# Altium PCB USB2CANFD.PcbDoc
Units mm, origin at the board's own origin, x right, y up, seen from the top; angles counter-clockwise.
Board outline 44.11 x 53.99 mm, 4 copper layers (TOP, PWR, GND, BOTTOM), stack 0.881 mm thick; 65 components, 67 nets, 249 pads, 228 vias.
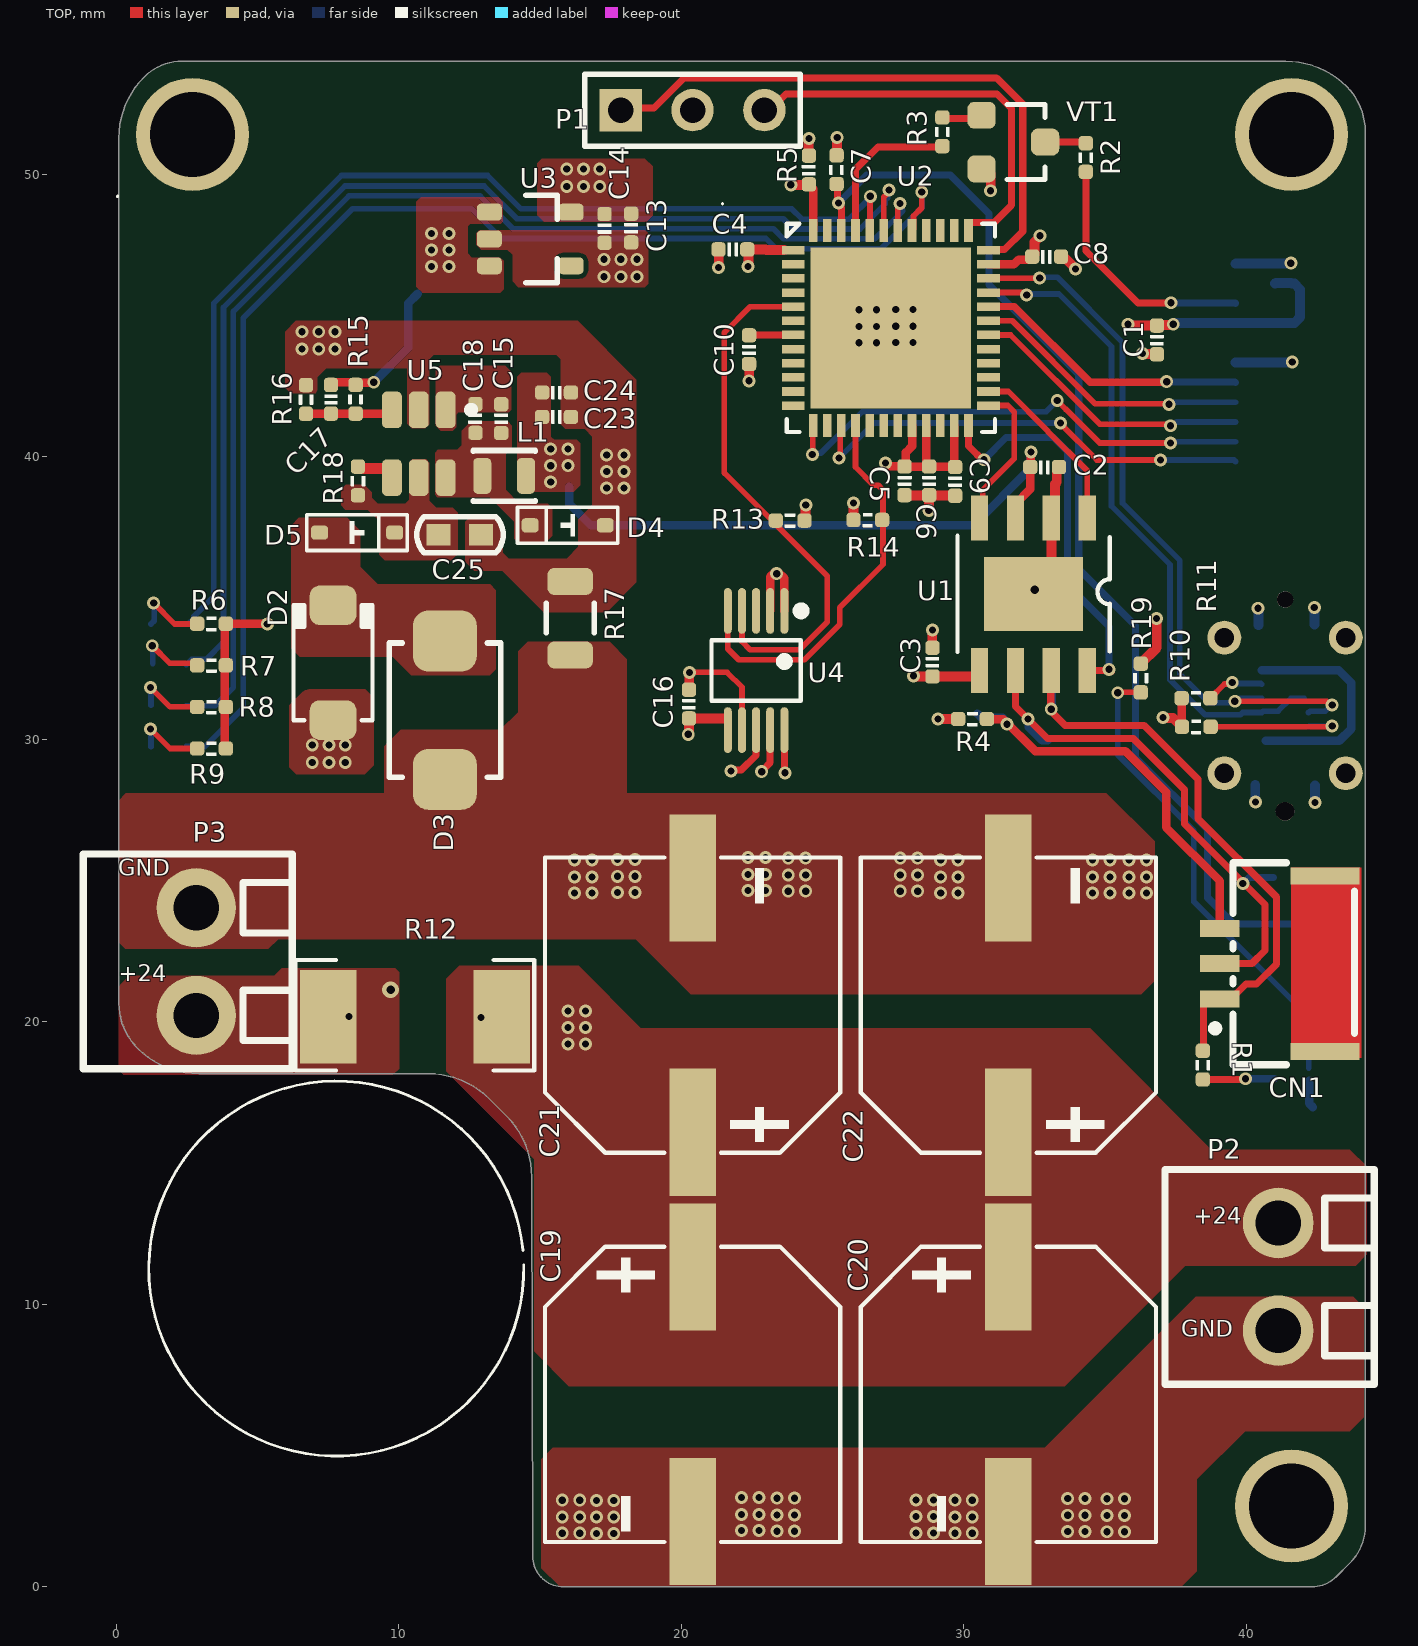
[diagram p0: TOP view]
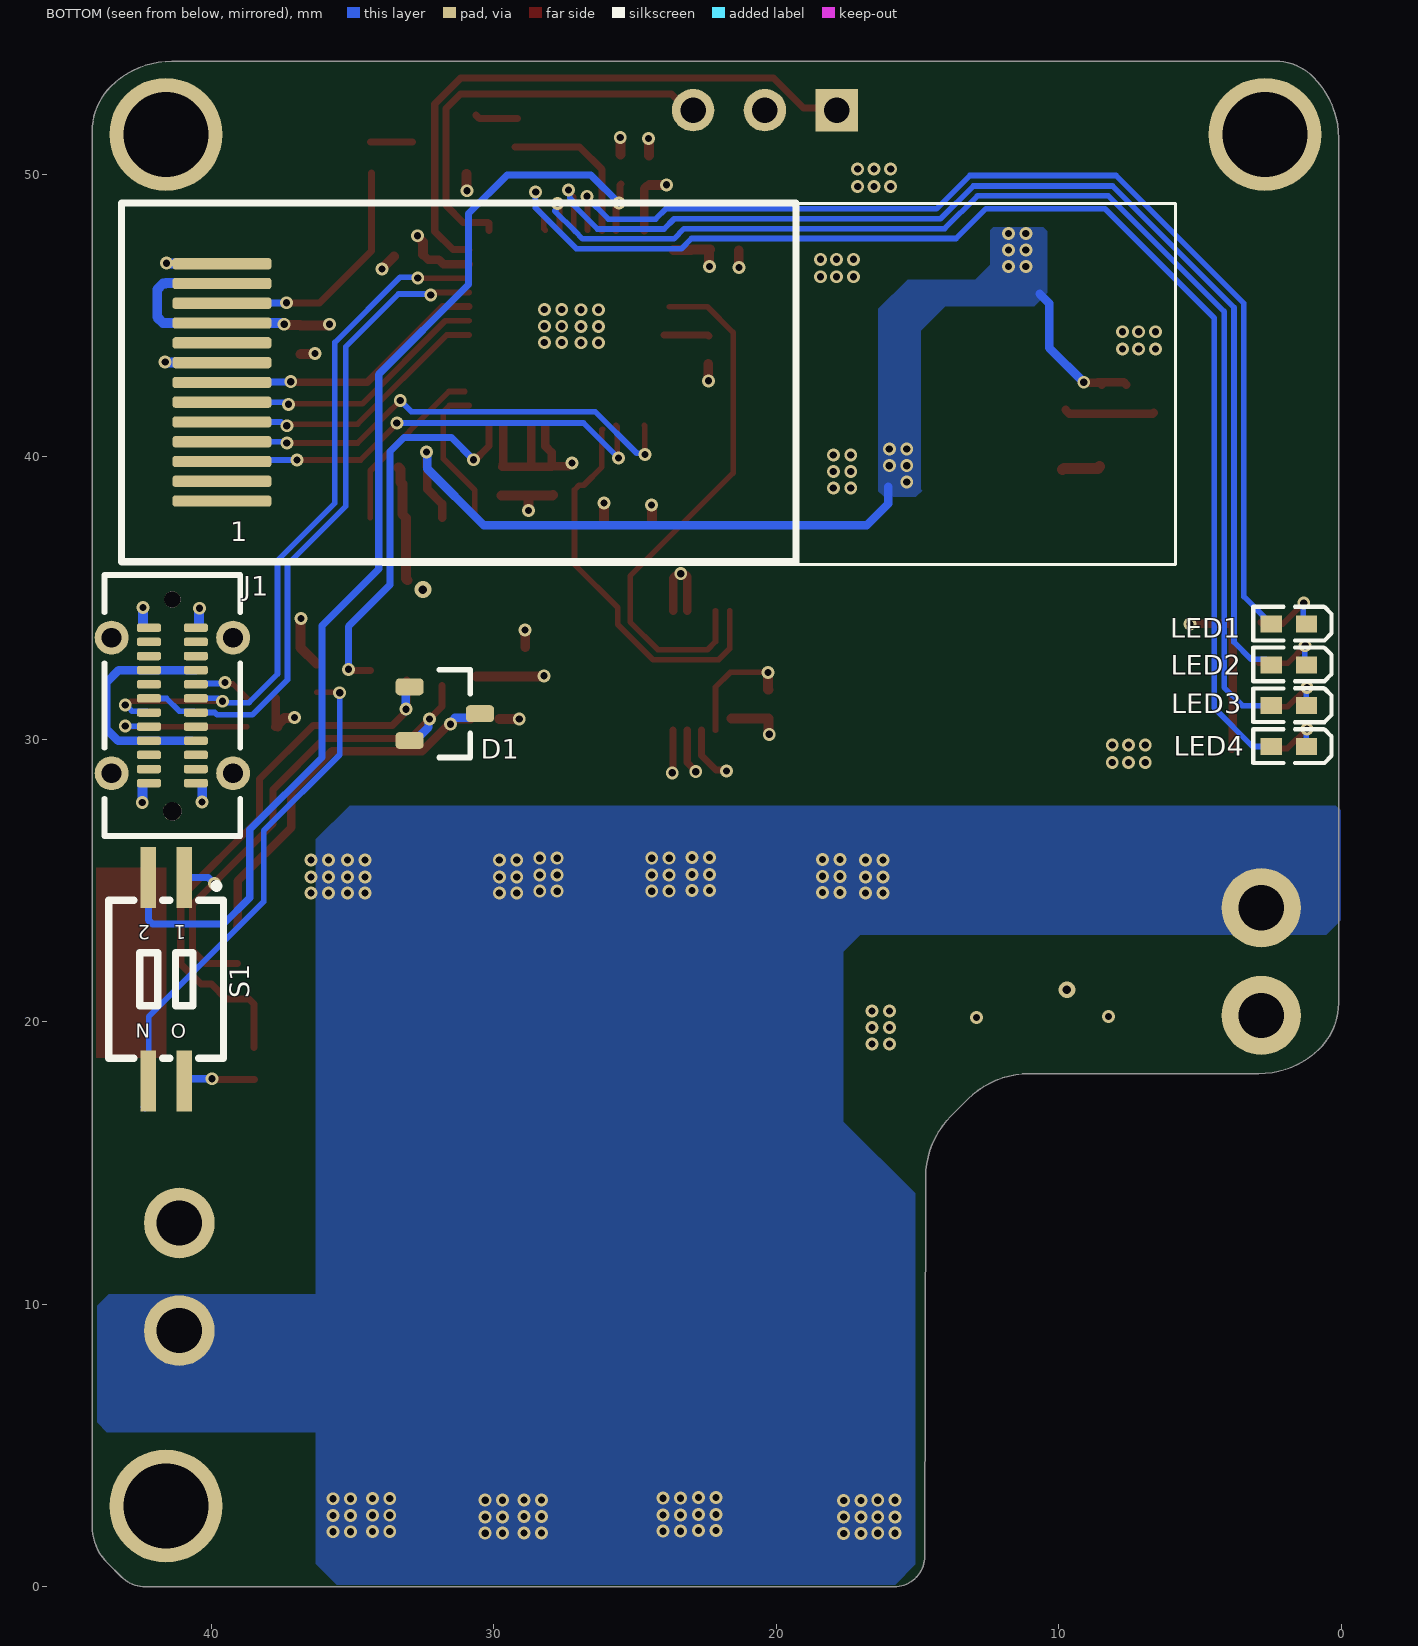
[diagram p1: BOTTOM view, seen from below]
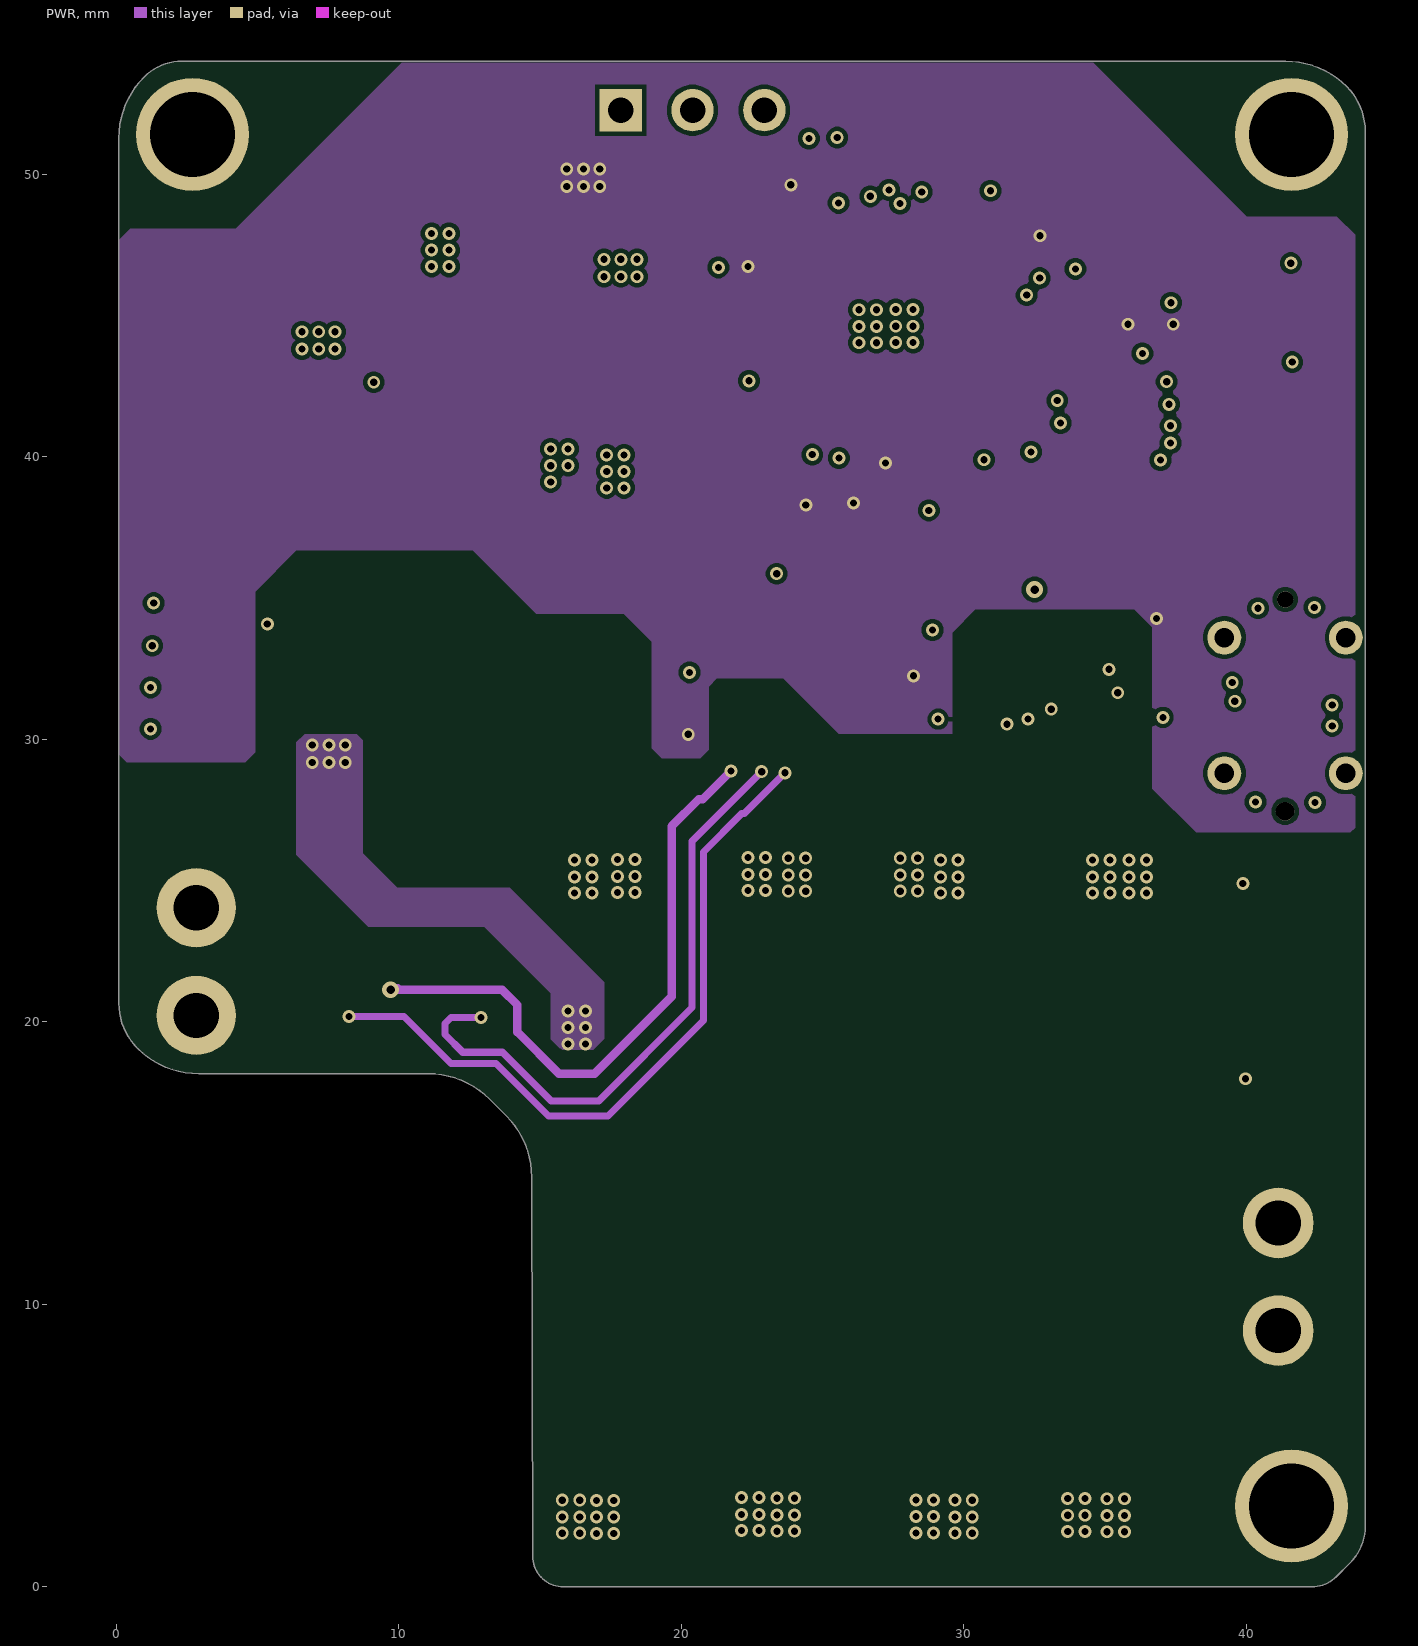
[diagram p2: PWR]
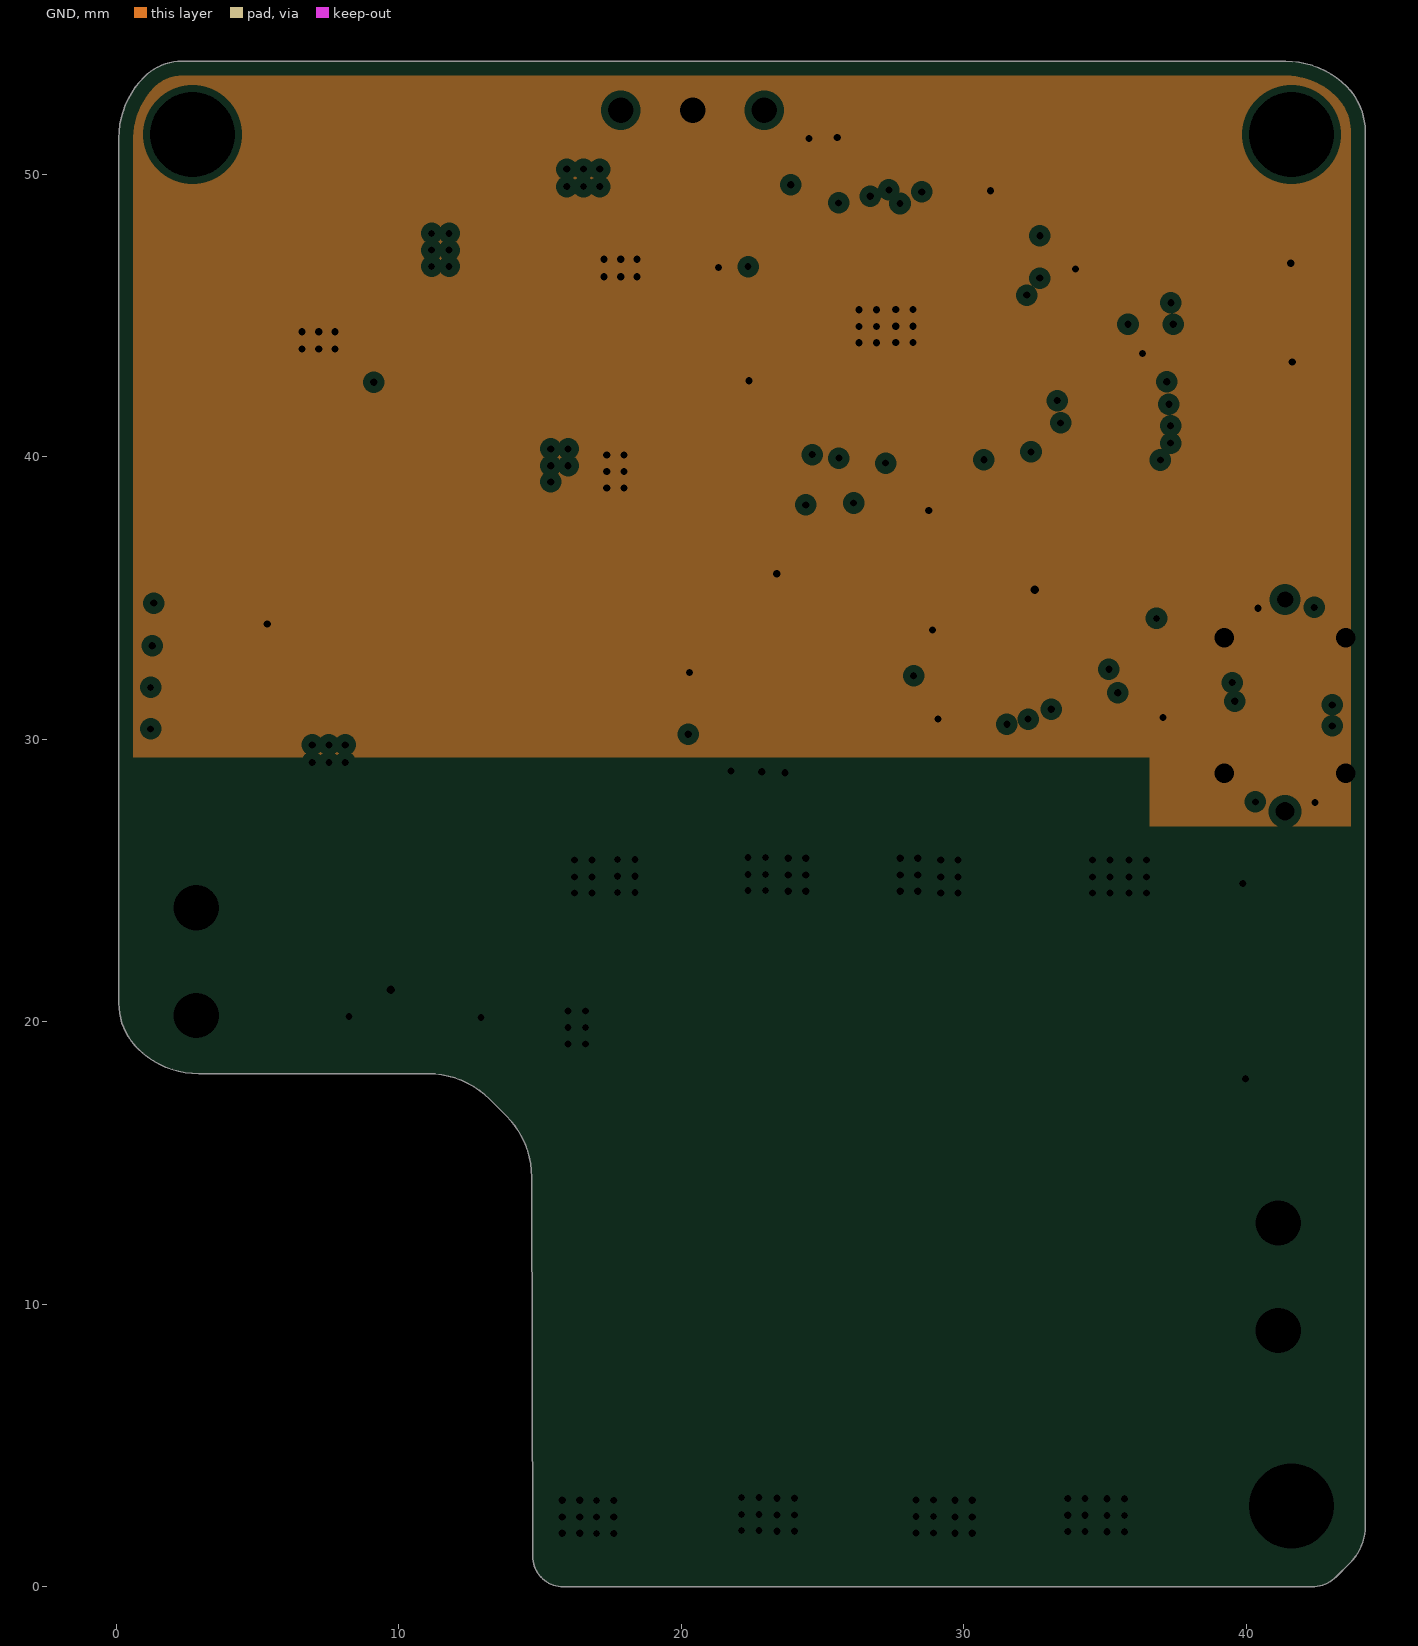
[diagram p3: GND, clearances drawn from the general rule]
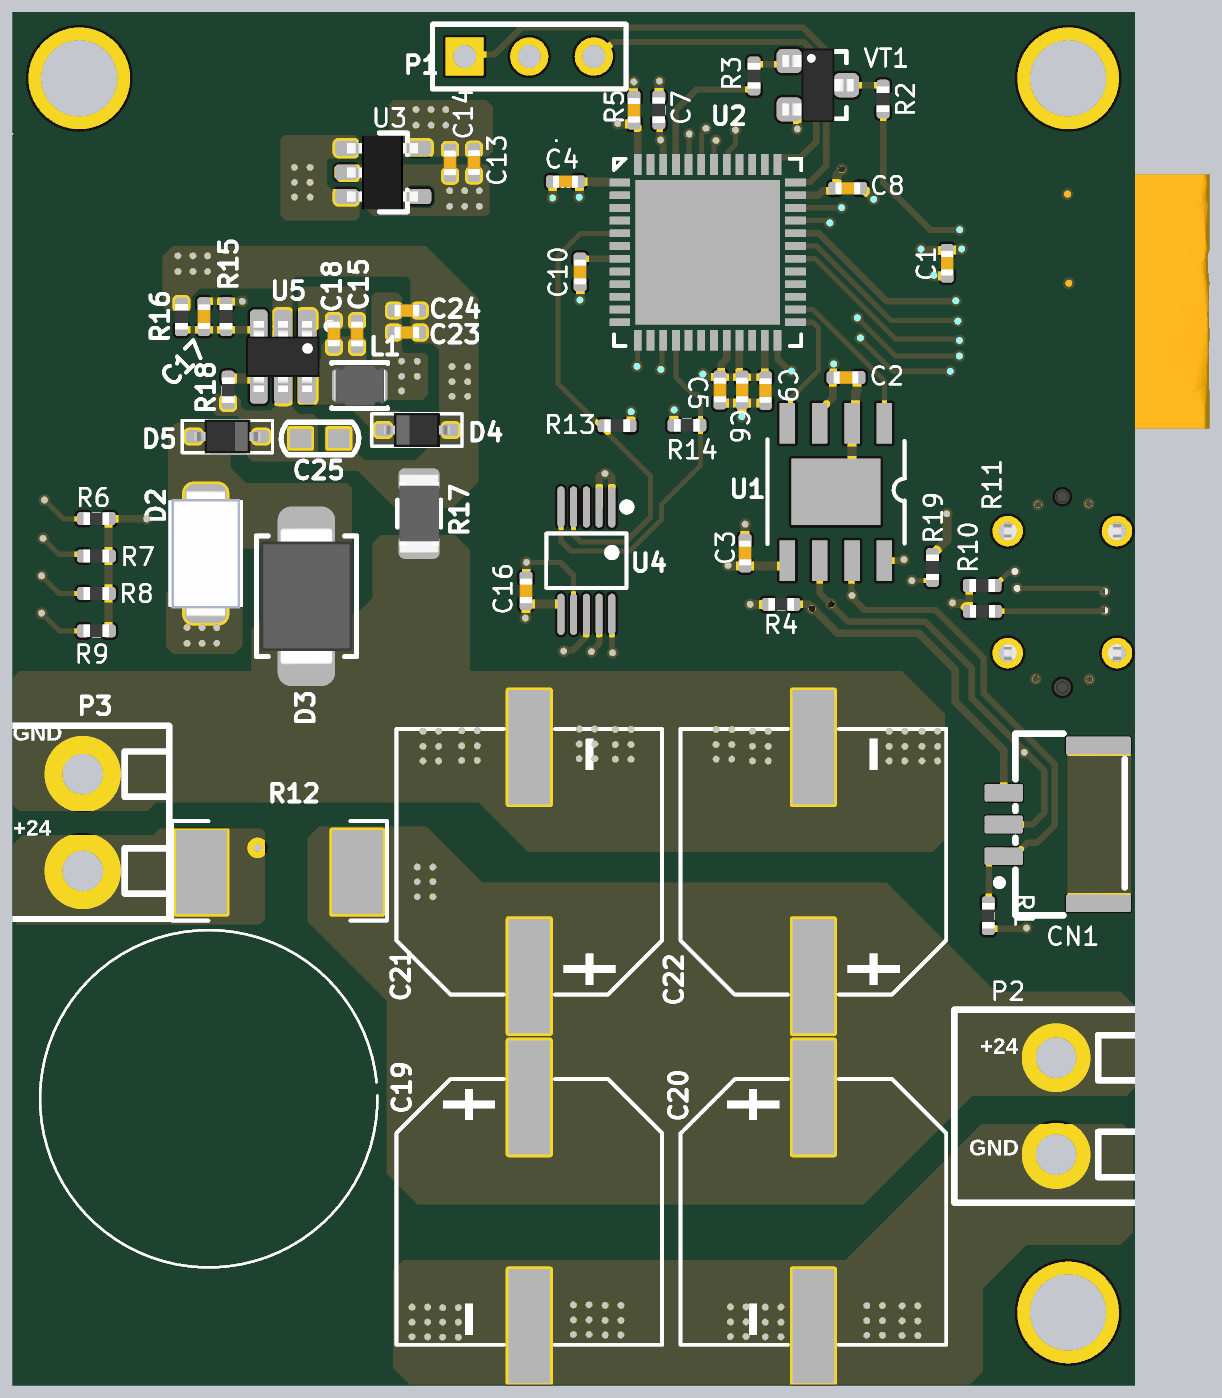
[diagram p4: 3D render of the assembled board from above, using the file's embedded part models]

## Layer stack, top to bottom
Top Solder: solder mask 0.0102, Solder Resist, Dk 3.5
TOP: signal copper 0.0175
Dielectric 1: prepreg 0.12, PP-006, Dk 4.1
PWR: signal copper 0.035
Dielectric 3: prepreg 0.0711, PP-006, Dk 4.1
GND: plane copper 0.5, net GND
Dielectric 2: core 0.12, Dk 4.2
BOTTOM: signal copper 0.0175
Bottom Solder: solder mask 0.0102, Solder Resist, Dk 3.5

## Board outline
2.932,18.158 11.052,18.158 cw(c11.052,15.092) 13.22,17.26 13.817,16.664 cw(c11.649,14.496) 14.715,14.496 14.744,1.089 ccw(c15.833,1.089) 15.833,0 42.332,0 ccw(c42.332,1.208) 43.187,0.354 43.674,0.841 ccw(c42.369,2.146) 44.214,2.146 44.214,51.518 ccw(c41.983,51.518) 43.561,53.096 ccw(c41.393,50.928) 41.393,53.994 2.334,53.994 ccw(c2.334,52.104) 0.998,53.441 ccw(c3.166,51.272) 0.1,51.272 0.1,20.658 ccw(c2.366,20.658) 0.764,19.056 ccw(c2.932,21.224)

## Design rules (kind name [scope] priority, off if disabled: settings)
Clearance Clearance_6 [All] p1 off: gap=0.3 ignorepadtopadclearanceinfootprint=FALSE
Clearance Clearance_5 [InNamedPolygon('GND3')] p2 off: gap=0.5 ignorepadtopadclearanceinfootprint=FALSE
Clearance Clearance_4 [InNamedPolygon('GND2')] p3 off: gap=0.254 ignorepadtopadclearanceinfootprint=FALSE except(0: Arc-Hole Track-Hole SMDPad-Hole THPad-Hole Via-Hole Fill-Hole Poly-Hole Region-Hole Text-Hole)
Clearance Clearance_2 [InNamedPolygon('GND1')] p4 off: gap=0.254 ignorepadtopadclearanceinfootprint=FALSE except(0: Arc-Hole Track-Hole SMDPad-Hole THPad-Hole Via-Hole Fill-Hole Poly-Hole Region-Hole Text-Hole)
Clearance Clearance_1 [InNamedPolygon('5V')] p5 off: gap=0.254 ignorepadtopadclearanceinfootprint=FALSE except(0: Arc-Hole Track-Hole SMDPad-Hole THPad-Hole Via-Hole Fill-Hole Poly-Hole Region-Hole Text-Hole)
Clearance [All] p6: gap=0.15 ignorepadtopadclearanceinfootprint=FALSE
Clearance Clearance_3 [(IsKeepOut) vs InPolygon] p7 off: gap=0.152 ignorepadtopadclearanceinfootprint=FALSE except(0: Arc-Hole Track-Hole SMDPad-Hole THPad-Hole Via-Hole Fill-Hole Poly-Hole Region-Hole Text-Hole)
ComponentClearance [All] p1 off: gap=0.254 collisioncheckmode=3 verticalgap=0.254 showdistances=FALSE
FabricationTestPointUsage TestPointUsage [All] p1: valid=0 allowmultiple=FALSE
FabricationTestpoint Testpoint [All] p1: side=3 testpointundercomponent=TRUE minsize=1.016 maxsize=2.54 preferedsize=1.524 minholesize=0 maxholesize=1.016 preferedholesize=0.813 testpointgrid=0.025 allowsidetop=TRUE allowsidebottom=TRUE usegrid=TRUE gridtolerance=0
HoleSize [All] p1: absolutevalues=TRUE maxlimit=2539.975 minlimit=0.025 maxpercent=80.000 minpercent=20.000
PlaneClearance [All] p1: clearance=0.254
PlaneConnect [All] p1: planeconnectstyle=Direct reliefexpansion=0.508 reliefentries=4 reliefconductorwidth=0.254 reliefairgap=0.254
PolygonConnect PolygonConnect_1 [All vs IsVia] p1: connectstyle=Direct reliefconductorwidth=0.254 reliefentries=4 polygonreliefangle="90 Angle" airgapwidth=0.254
PolygonConnect [All] p2: connectstyle=Direct reliefconductorwidth=0.635 reliefentries=4 polygonreliefangle="90 Angle" airgapwidth=0.254
RoutingLayers [All] p1: top layer_v5=FALSE mid layer 1_v5=FALSE bottom layer_v5=FALSE
RoutingVias [All] p1: holewidth=0.254 width=0.508 viastyle="Through Hole" minholewidth=0.025 minwidth=0.025 maxholewidth=254 maxwidth=254
SilkToSolderMaskClearance SilkscreenOverComponentPads [IsPad] p1: minsilkscreentomaskgap=0.254 clearancetoexposedcopper=TRUE
SolderMaskExpansion [All] p1: expansion=0.102 istentingtop=FALSE
Width [All] p1: maxlimit=254 minlimit=0.025 preferedwidth=0.152
22 further rules are at their usual default settings.

## Components (designator, comment, footprint, x,y, rotation, side; value= is the part's Value field where it differs from the comment)
1 "OLED-12880" OLED-12880 39.624,42.627 r0 bottom locked
C1 "10uF" CAP_0402 36.846,44.13 r90 top value=0.1u
C2 "0.1uF" CAP_0402 32.868,39.631 r0 top value=0.1u
C3 "0.1uF" CAP_0402 28.898,32.728 r90 top value=0.1u
C4 "10uF" CAP_0402 21.833,47.334 r0 top value=0.1u
C5 "0.1uF" CAP_0402 27.909,39.144 r270 top
C6 "1uF" CAP_0402 28.78,39.145 r270 top
C7 "0.1uF" CAP_0402 24.526,50.146 r270 top
C8 "0.1uF" CAP_0402 32.938,47.078 r0 top
C9 "0.1uF" CAP_0402 29.701,39.124 r270 top
C10 "0.1uF" CAP_0402 22.407,43.785 r90 top value=0.1u
C13 "0.1uF" CAP_0402 18.232,48.089 r90 top value=0.1u
C14 "10uF" CAP_0402 17.291,48.079 r90 top value=0.1u
C15 "0.1uF" CAP_0402 13.634,41.344 r90 top value=0.1u
C16 "0.1uF" CAP_0402 20.28,31.242 r270 top value=0.1u
C17 "100pF" CAP_0402 7.61,42.03 r270 top value=0.1u
C18 "0.1uF" CAP_0402 12.722,41.35 r90 top value=0.1u
C19 "220uF/25V" CAP-SMD_BD10.0-L10.3-W10.3-LS11.3-FD 20.407,6.812 r270 top value=470uF/35V
C20 "220uF/25V" CAP-SMD_BD10.0-L10.3-W10.3-LS11.3-FD 31.583,6.812 r270 top value=470uF/35V
C21 "220uF/25V" CAP-SMD_BD10.0-L10.3-W10.3-LS11.3-FD 20.407,20.585 r90 top value=470uF/35V
C22 "220uF/25V" CAP-SMD_BD10.0-L10.3-W10.3-LS11.3-FD 31.583,20.585 r90 top value=470uF/35V
C23 "0.1uF" CAP_0402 15.591,41.405 r180 top value=0.1u
C24 "10uF" CAP_0402 15.592,42.268 r180 top value=0.1u
C25 "10uF/35V" C0603 12.184,37.23 r0 top value="22uF 35V"
CN1 "WAFER-GH1.25-3PLT-W1-P" CONN-SMD_WAFER-GH1.25-3PLT-W1-P 40.932,22.052 r90 top
D1 "NUP2105" SOT23-3 31.737,30.902 r180 bottom
D2 "SS54" DO-214AC 7.682,32.706 r90 top
D3 "SMBJ28CA" SMBJ-CA_MFG 11.642,31.028 r90 top
D4 "二极管-5819W" SOD-323 15.987,37.569 r180 top
D5 "二极管-5819W" SOD-323 8.533,37.311 r0 top
J1 "USB-TYPE-C-STAND" USB-TYPE-C-STAND 41.378,31.192 r90 bottom locked
L1 "6.8uH" IND-201612 13.738,39.318 r0 top
LED1 "LED RED" LED0402-R-RD 1.86,34.075 r0 bottom
LED2 "LED GREEN" LED0402-R-RD 1.86,32.63 r0 bottom
LED3 "LED RED" LED0402-R-RD 1.86,31.185 r0 bottom
LED4 "LED GREEN" LED0402-R-RD 1.86,29.741 r0 bottom
P1 "Header 3" HDR1X3 17.866,52.261 r0 top
P2 "Header 2" CONN-TH_2P-P3.81_L7.4-W7.6#1 41.132,10.971 r90 top
P3 "Header 2" CONN-TH_2P-P3.81_L7.4-W7.6#2 2.84,22.128 r270 top locked
R1 "120R/NC" RES_0402_1 38.467,18.463 r270 top value=22R
R2 "10R" RES_0402_1 34.326,50.585 r270 top
R3 "1K" RES_0402_1 29.248,51.497 r90 top value=22R
R4 "0" RES_0402 30.315,30.712 r0 top
R5 "DNI" RES_0402 25.504,50.154 r90 top
R6 "220" RES_0402_1 3.379,34.083 r180 top
R7 "220" RES_0402_1 3.379,32.611 r180 top
R8 "220" RES_0402_1 3.379,31.14 r180 top
R9 "220" RES_0402_1 3.379,29.668 r180 top
R10 "5.1K" RES_0402_1 38.236,30.439 r180 top value=22R
R11 "5.1K" RES_0402_1 38.224,31.449 r180 top value=22R
R12 "1mR" RES-SMD_L6.4-W3.2-R2512 10.579,20.175 r0 top
R13 "10K" RES_0402_1 23.861,37.736 r0 top value=22R
R14 "10K" RES_0402_1 26.61,37.759 r180 top value=22R
R15 "10K" RES_0402_1 8.48,42.03 r90 top value=22R
R16 "1.8K" RES_0402_1 6.725,42.024 r270 top value=22R
R17 "0R" 1206-RES 16.073,34.283 r270 top
R18 "1M" RES_0402_1 8.563,39.138 r90 top value=22R
R19 "1K" RES_0402_1 36.272,32.163 r90 top
S1 "ZX-1.27BM-2PSMD" SW-SMD_2P-L5.4-W4.1-P1.27-LS8.4 41.594,21.502 r0 bottom locked
U1 "TCAN1057AVDRBRQ1" SOIC8_2 32.471,35.123 r270 top
U2 "moteus_STM32G474CEU6" moteus:UFQFPN-48_7X7X0P55MM 27.425,44.557 r180 top value=STM32G474CEU6
U3 "ME6211 3V3" SOT23-5 14.713,47.704 r180 top
U4 "INA226" MSOP-10_L3.0-W3.0-P0.50-LS5.0-BL 22.654,32.43 r180 top
U5 "ME3116" SOT23-6 10.715,40.455 r270 top
VT1 "S8050" SMT_TRIODE_NPN 31.76,51.132 r270 top

## Footprints (in the part's own frame and the unit in brackets; to place one, negate y for a bottom-side part, rotate by r counter-clockwise, add the part's x,y. Pads: shape width x height; smd on the part's side, far side on the other; paste and mask are expansions set on the pad)
1206-RES [mm]
  rrect50% 0.956x1.61 smd paste+0 mask+0: 1(-1.301,0) 2(1.301,0)
  silkscreen extent -0.52,-0.85 0.52,0.85, body extent -1.55,-0.77 1.55,0.78, height 0.65
C0603 [mm]
  rect 0.86x0.76 smd: 1(-0.768,0.005) 2(0.732,0.005)
  silkscreen extent -1.53,-0.64 1.52,0.65, body extent -1.5,-0.75 1.5,0.75, height 1.5
CAP-SMD_BD10.0-L10.3-W10.3-LS11.3-FD [mm]
  rect 4.5x1.65 smd: 1(-4.5,0) 2(4.5,0)
  silkscreen extent -5.23,-5.23 5.23,5.23
CAP_0402 [mil]
  rrect50% 20x20 smd: 1(-20,0) 2(20,0)
  silkscreen extent -7,-9 7,9, body extent -20,-10 20,10, height 20
CONN-SMD_WAFER-GH1.25-3PLT-W1-P [mm]
  rect 0.6x1.4 smd paste+0.051: 1(-1.25,1.862) 2(0,1.862) 3(1.25,1.862)
  rect 0.6x2.45 smd paste+0.051: 4(3.1,-1.862) 5(-3.1,-1.862)
  silkscreen extent -3.58,-2.9 3.58,2.16
CONN-TH_2P-P3.81_L7.4-W7.6#1 [mm]
  round 2.5 hole 1.6: 1(-1.905,0) 2(1.905,0)
  silkscreen extent -3.8,-3.4 3.8,4
CONN-TH_2P-P3.81_L7.4-W7.6#2 [mm]
  round 2.8 hole 1.6: 1(-1.905,0) 2(1.905,0)
  silkscreen extent -3.8,-4 3.8,3.4
DO-214AC [mil] "SMA"
  rrect50% 55x65 smd: 1(-80,0) 2(80,0)
  silkscreen extent -80,-55 80,55, body extent -98,-53 98,53, height 85
HDR1X3 [mm] "Connector; Header; 3 Position"
  rect 1.5x1.5 hole 0.9: 1(0,0)
  round 1.5 hole 0.9: 2(2.54,0) 3(5.08,0)
  silkscreen extent -1.27,-1.27 6.35,1.27
IND-201612 [mm]
  rrect50% 0.635x1.27 smd paste+0 mask+0: 1(-0.774,0) 2(0.774,0)
  silkscreen extent -1.1,-0.9 1.1,0.9, body extent -1,-0.8 1,0.8, height 0.95
LED0402-R-RD [mm]
  rect 0.75x0.6 smd: A(0.623,0) C(-0.623,0)
  silkscreen extent -1.51,-0.61 1.26,0.58
moteus:UFQFPN-48_7X7X0P55MM [mil]
  rect 32x12 smd paste+0 mask+0: 1(136,-108.27) 2(136,-88.58) 3(136,-68.9) 4(136,-49.21) 5(136,-29.53) 6(136,-9.84) 7(136,9.84) 8(136,29.53) 9(136,49.21) 10(136,68.9) 11(136,88.58) 12(136,108.27) 25(-136,108.27) 26(-136,88.58) 27(-136,68.9) 28(-136,49.21) 29(-136,29.53) 30(-136,9.84) 31(-136,-9.84) 32(-136,-29.53) 33(-136,-49.21) 34(-136,-68.9) 35(-136,-88.58) 36(-136,-108.27)
  rect 12x32 smd paste+0 mask+0: 13(108.27,136) 14(88.58,136) 15(68.9,136) 16(49.21,136) 17(29.53,136) 18(9.84,136) 19(-9.84,136) 20(-29.53,136) 21(-49.21,136) 22(-68.9,136) 23(-88.58,136) 24(-108.27,136) 37(-108.27,-136) 38(-88.58,-136) 39(-68.9,-136) 40(-49.21,-136) 41(-29.53,-136) 42(-9.84,-136) 43(9.84,-136) 44(29.53,-136) 45(49.21,-136) 46(68.9,-136) 47(88.58,-136) 48(108.27,-136)
  rect 224x224 smd paste+0 mask+0: 49(0,0)
  silkscreen extent -145,-145 145,145
MSOP-10_L3.0-W3.0-P0.50-LS5.0-BL [mm]
  oval 0.28x1.62 smd: 1(-1,-2.11) 2(-0.5,-2.11) 3(0,-2.11) 4(0.5,-2.11) 5(1,-2.11) 6(1,2.11) 7(0.5,2.11) 8(0,2.11) 9(-0.5,2.11) 10(-1,2.11)
  silkscreen extent -1.74,-2.26 1.58,1.07
OLED-12880 [mm]
  rrect50% 3.5x0.4 smd: 1(0,4.2) 2(0,3.5) 3(0,2.8) 4(0,2.1) 5(0,1.4) 6(0,0.7) 7(0,0) 8(0,-0.7) 9(0,-1.4) 10(0,-2.1) 11(0,-2.8) 12(0,-3.5) 13(0,-4.2)
  silkscreen extent -20.32,-6.35 3.56,6.35, body extent -20.18,-6.25 7.54,6.25, height 1.55
RES-SMD_L6.4-W3.2-R2512 [mm]
  rect 2x3.3 smd: 1(-3.066,0) 2(3.066,0)
  silkscreen extent -4.23,-1.91 4.23,2.01
RES_0402 [mil]
  rrect50% 20x20 smd: 1(-20,0) 2(20,0)
  silkscreen extent -7,-10 6,10, body extent -20,-10 20,10, height 14
RES_0402_1 [mil]
  rrect50% 20x20 smd: 1(-20,0) 2(20,0)
  silkscreen extent -7,-10 6,10, body extent -20,-10 20,10, height 14
SMBJ-CA_MFG [mm]
  rrect50% 2.16x2.26 smd paste+0 mask+0: 1(-2.45,0) 2(2.45,0)
  silkscreen extent -2.37,-1.97 2.38,1.97, body extent -2.7,-1.81 2.7,1.81, height 2.62
SMT_TRIODE_NPN [mm] "Surface mount NPN transistor, package SOT-23"
  rrect50% 0.95x1 smd: 1(-0.95,-1.125) 2(0.95,-1.125) 3(0,1.125)
  silkscreen extent -1.33,-0.22 1.32,1.13, body extent -1.45,-1.4 1.45,1.4, height 1.3
SOD-323 [mm]
  rrect50% 0.6x0.5 smd: 1(-1.329,0) 2(1.329,0)
  silkscreen extent -1.78,-0.63 1.78,0.64, body extent -1.3,-0.68 1.3,0.67, height 1.15
SOIC8_2 [mil] "SOIC8_1P27_4X5"
  rect 63x24 smd: 1(-106.62,74.92) 2(-106.62,24.92) 3(-106.62,-25.08) 4(-106.62,-75.08) 5(105.98,-75.08) 6(105.98,-25.08) 7(105.98,24.92) 8(105.98,74.92)
  rect 103x138 smd: 9(-0.32,-0.08)
  silkscreen extent -82,-106 80,107
SOT23-3 [mm] "SOT23, 3-Leads, Body 3.1x3.0mm (max), Pitch 0.95mm, IPC Medium Density"
  rrect50% 1x0.6 smd: 1(-1.246,0.95) 2(-1.246,-0.95) 3(1.246,0)
  silkscreen extent -0.2,-1.55 0.9,1.55, body extent -1.3,-1.45 1.5,1.45, height 1.2
SOT23-5 [mm] "SOT23, 3-Leads, Body 3.1x3.0mm (max), Pitch 0.95mm, IPC Medium Density"
  rrect50% 0.889x0.6 smd: 1(1.5,-0.95) 2(1.5,0) 3(1.5,0.95) 4(-1.396,0.95) 5(-1.396,-0.95)
  silkscreen extent -0.9,-1.55 0.2,1.55, body extent -1.32,-1.45 1.48,1.45, height 1.2
SOT23-6 [mm]
  rrect50% 1.3x0.7 smd: 1(-1.2,0.95) 2(-1.2,0) 3(-1.2,-0.95) 4(1.2,-0.95) 5(1.2,0) 6(1.2,0.95)
  silkscreen extent -1.32,1.73 -1.08,1.98, body extent -1.4,-1.45 1.4,1.45, height 1.45
SW-SMD_2P-L5.4-W4.1-P1.27-LS8.4 [mm]
  rect 0.56x2.158 smd: 1(-0.635,-3.594) 2(0.635,-3.594) 3(0.635,3.594) 4(-0.635,3.594)
  silkscreen extent -2.03,-3.41 2.03,2.79
USB-TYPE-C-STAND [mm]
  rrect50% 0.3x0.85 smd: A1(-2.75,0.83) A2(-2.25,0.83) A3(-1.75,0.83) A4(-1.25,0.83) A5(-0.75,0.83) A6(-0.25,0.83) A7(0.25,0.83) A8(0.75,0.83) A9(1.25,0.83) A10(1.75,0.83) A11(2.25,0.83) A12(2.75,0.83) B1(2.75,-0.83) B2(2.25,-0.83) B3(1.75,-0.83) B4(1.25,-0.83) B5(0.75,-0.83) B6(0.25,-0.83) B7(-0.25,-0.83) B8(-0.75,-0.83) B9(-1.25,-0.83) B10(-1.75,-0.83) B11(-2.25,-0.83) B12(-2.75,-0.83)
  round 1.2 hole 0.7: S1(-2.4,2.15) S2(2.4,2.15) S3(-2.4,-2.15) S4(2.4,-2.15)
  round 0.66 hole 0.66 unplated: ""(-3.75,0)
  round 0.58 hole 0.58 unplated: ""(3.75,0)
  silkscreen extent -4.62,-2.4 4.62,2.4, body extent -4.52,-2.3 4.52,2.3, height 7.39

## Part data
1: library part LCD-ST7735
C1 C2 C3 C4 C10 C13 C14 C15 C16 C17 C18 C23 C24 C25: library part 电容-0402, "Capacitor"
C5 C7 C8 C9: library part GRM188R71H104KA93D, "CAP CER 0.1UF 50V X7R 0603", Manufacturer="Murata Electronics North America", Operating Temperature="-55°C ~ 125°C", Package / Case="0603 (1608 Metric)", Ratings=-, Supplier Part Number 1=490-1519-2-ND, Temperature Coefficient=X7R, Tolerance=±10%, Voltage - Rated=50V, Applications="General Purpose", Capacitance=0.1uF, Category=Capacitors, ComponentLink1Description=http://www.murata.com/~/media/webrenewal/support/library/catalog/products/capacitor/mlcc/c02e.ashx?la=en-us, ComponentLink1URL=http://www.murata.com/~/media/webrenewal/support/library/catalog/products/capacitor/mlcc/c02e.ashx?la=en-us, Features=-, Height - Seated (Max)=-, Lead Spacing=-, Lead Style=-, Manufacturer Part Number=GRM188R71H104KA93D, Mounting Type="Surface Mount, MLCC", Packaging="Tape & Reel (TR)", Part Status=Active, Pricing 1="4000=0.01822, 8000=0.01663, 12000=0.01584 (USD)", Pricing 2="1=0.12, 10=0.084, 100=0.0396, 500=0.02778, 1000=0.023 (USD)", RoHS="RoHS Compliant", Size / Dimension="0.063\" L x 0.032\" W (1.60mm x 0.80mm)", Stock=19812000, Supplier 1=Digi-Key, Supplier 2=Digi-Key, Supplier Part Number 2=490-1519-1-ND, Thickness (Max)="0.035\" (0.90mm)"
C6: library part GRM188R71H104KA93D, "CAP CER 1UF 50V X7R 0603", Manufacturer="Murata Electronics North America", Operating Temperature="-55°C ~ 125°C", Package / Case="0603 (1608 Metric)", Ratings=-, Supplier Part Number 1=490-1519-2-ND, Temperature Coefficient=X7R, Tolerance=±10%, Voltage - Rated=50V, Applications="General Purpose", Capacitance=1uF, Category=Capacitors, ComponentLink1Description=http://www.murata.com/~/media/webrenewal/support/library/catalog/products/capacitor/mlcc/c02e.ashx?la=en-us, ComponentLink1URL=http://www.murata.com/~/media/webrenewal/support/library/catalog/products/capacitor/mlcc/c02e.ashx?la=en-us, Features=-, Height - Seated (Max)=-, Lead Spacing=-, Lead Style=-, Manufacturer Part Number=GRM188R71H104KA93D, Mounting Type="Surface Mount, MLCC", Packaging="Tape & Reel (TR)", Part Status=Active, Pricing 1="4000=0.01822, 8000=0.01663, 12000=0.01584 (USD)", Pricing 2="1=0.12, 10=0.084, 100=0.0396, 500=0.02778, 1000=0.023 (USD)", RoHS="RoHS Compliant", Size / Dimension="0.063\" L x 0.032\" W (1.60mm x 0.80mm)", Stock=19812000, Supplier 1=Digi-Key, Supplier 2=Digi-Key, Supplier Part Number 2=490-1519-1-ND, Thickness (Max)="0.035\" (0.90mm)"
C19 C20 C21 C22: library part CAP, "Capacitor, chip, ceramic", Parameters="E22 CAP", PN=RVT1E221M0607, Price=0.038
D2: library part Diode_SMA, "Diode", Type=SMA
D4 D5: "40V"
J1: Package=None, Availability=Unavailable, DigiKey-Purchase-URL=https://snapeda.com/shop?store=DigiKey&id=3596593, MF="Wurth Electronics", MP=632722110112, Price=None, SnapEDA_Link=https://www.snapeda.com/parts/632722110112/Wurth%20Electronics%20Inc./view-part/3596593/?ref=snap
L1: library part 电感-201612
LED1 LED2 LED3 LED4: library part LED, "LED GRN SGL RA 25mA 4.1V SMD", AGILE_PN=370-76642, CAD_APPROVED=Yes, CLASS=IC, HEIGHT=4.25MM, MFG_NAME01=Kingbright, MFG_PN01=AA4040ZGS, PN=19-217/G7C-AN1P2/3T, RoHS=Yes
P1: "Header, 3-Pin", LatestRevisionDate=17-Jul-2002, LatestRevisionNote="Re-released for DXP Platform.", Publisher="Altium Limited"
P2 P3: "Header, 2-Pin", LatestRevisionDate=17-Jul-2002, LatestRevisionNote="Re-released for DXP Platform.", Publisher="Altium Limited"
R1 R2 R3 R4 R5 R6 R7 R8 R9 R10 R11 R13 R14 R15 R16 R18 R19: library part 电阻-0402, "Resistor"
R12 R17: library part 电阻-1206, "Resistor"
S1: Color=黑色, Current Rating=25mA, JLCPCB Part Class="Extended Part", LCSC Part Name="间距1.27mm 平拨,凹槽式 2位拨码开关", Manufacturer=Megastar(兆星), Operating Life=3千次, Operating Temperature=-30℃~+85℃, Voltage Rating=24V, Add into BOM=yes, Circuit=单刀单掷, Convert to PCB=yes, Datasheet=https://atta.szlcsc.com/upload/public/pdf/source/20231012/60E7F445862B8AF86BF5174C6B4E0EC9.pdf, Device=ZX-1.27BM-2PSMD, Lead Pitch=1.27mm, Manufacturer Part=ZX-1.27BM-2PSMD, Number of Positions=2位, Pin Style=鸥翼型, Supplier=LCSC, Supplier Footprint=SMD-4P,4.1x5.4mm, Supplier Part=C7462922, Symbol=ZX-1.27BM-2PSMD, Type=平拨,凹槽式
U1: library part SIT1042ATK/3, JLCPCB Part Class="Extended Part", LCSC Part Name="SIT1042A CAN FD待机模式总线收发器", Manufacturer=SIT(芯力特), Operating Temperature=-40℃~+150℃, Supply Current=-, Supply Voltage=4.5V~5.5V, Add into BOM=yes, Convert to PCB=yes, Data Rate=5Mbps, Datasheet=https://atta.szlcsc.com/upload/public/pdf/source/20240906/0721301B0EA65A9C8E3ABE7B44C999B5.pdf, Device=SIT1042ATK/3, Manufacturer Part=SIT1042ATK/3, Supplier=LCSC, Supplier Footprint=DFN-8(3x3), Supplier Part=C5382546, Symbol=SIT1042ATK/3, Type=CAN-FD收发器
U2: MPN=STM32G474CEU6, AddInBom=yes, Device=moteus_STM32G474CEU6, FootprintName=moteus:UFQFPN-48_7X7X0P55MM, ki_fp_filters="UFQFPN-48_7X7X0P55MM UFQFPN-48_7X7X0P55MM-M UFQFPN-48_7X7X0P55MM-L", ki_keywords=STM32G474CEU6, MF=ST, POPULATE=1, Symbol=moteus_STM32G474CEU6, UniqueId=eac3f191c372887e, UserDocLink=STM32G474CEU6
U3: library part LP2992, "LDO"
U4: Manufacturer_Name=CTS, Manufacturer_Part_Number=218-4LPSTJ, Mouser Part Number=774-218-4LPSTJ, Datasheet Link=https://www.ctscorp.com/wp-content/uploads/218.pdf, Geometry.Height=2.7mm, Mouser Price/Stock=https://www.mouser.co.uk/ProductDetail/CTS-Electronic-Components/218-4LPSTJ?qs=qNzHFtQhdJ%2Frpuf7cnHHWA%3D%3D
U5: "DC-DC"
VT1: library part SMT_TRIODE_NPN, "Surface mount NPN transistor, package SOT-23"
CN1: Symbol=WAFER-GH1.25-3PLT-W1-P

## Free pads (board coordinates)
  round 4 hole 3: ""(2.707,51.403) ""(41.605,2.854) ""(41.605,51.403)

## Via types
v1: diameter 0.457, hole 0.254, TOP to BOTTOM, tented both sides, 226 vias
v2: diameter 0.6, hole 0.3, TOP to BOTTOM, 2 vias

## Nets (pads, with @x,y where several pads share a name; then routed paths per layer and width w, separated by ;. In a path a pad name is that pad's centre, name@x,y a point inside that pad or via, vN(x,y) a via of type N, cw(c..) or ccw(c..) an arc to the next point about the centre after c; other vN are vias at no path point)
3V3: 1.10 1.12 C1.2 C3.1 C4.2 C5.1 C6.1 C7.2 C8.1 C9.1 C13.2 C14.2 C16.2 R13.2 R14.2 R19.2 U1.5 U2.1 U2.20 U2.21 U2.23 U2.35 U2.48 U3.5 U4.6 | length 28.6
  TOP w0.3: C7.2@24.545,49.59 24.574,49.59 24.675,49.488 U2.48 ; v1@27.247,39.76 27.355,39.652 C5.1 ; C5.1@27.945,39.642 29.691,39.642 C9.1 ; C5.1@27.958,39.71 27.958,40.15 28.175,40.367 U2.20 ; C6.1@28.675,39.758 U2.21 ; U2.23 29.675,39.736 29.682,39.73 C9.1@29.69,39.73 ; U2.35 31.782,46.807 31.949,46.974 32.326,46.974 32.402,47.051 C8.1@32.402,47.057
  TOP w0.35: v1@20.28,30.18 C16.2 20.283,30.731 U4.6@21.592,30.731 ; C4.2 22.996,47.334 23.013,47.317 U2.1@23.644,47.317 ; v1@22.383,46.737 C4.2@22.383,47.329 ; v1@23.894,49.609 C7.2@24.486,49.609 ; R13.2@24.404,37.686 v1@24.404,38.278 ; R14.2@26.096,37.756 v1@26.096,38.348 ; v1@28.208,32.202 28.226,32.22 C3.1 30.603,32.22 U1.5@30.611,32.212 ; C8.1@32.509,47.157 32.509,47.595 32.703,47.789 v1(32.703,47.818) ; v1@35.839,44.638 C1.2 36.863,44.655 v1@37.417,44.655 ; R19.2 36.837,33.236 36.837,34.264 v1(36.827,34.274)
  BOTTOM w0.35: v1@37.487,44.735 37.495,44.727 1.10 41.707,44.727 41.912,44.932 41.912,45.921 41.707,46.126 41.624,46.126 41.598,46.152 41.047,46.152 1.12@41.021,46.126
  other v1: 20.252,30.172 28.228,32.242 24.414,38.288 26.106,38.358 27.237,39.77 35.818,44.686 37.42,44.686 22.372,46.727 15.954,49.56 16.547,49.56 17.122,49.56 23.884,49.62 15.954,50.176 16.547,50.176 17.122,50.176
AS5047_CS_1: U2.19
AUX1_B_1: LED3.A U2.42 | length 43
  TOP w0.2: U2.42 27.675,48.815 27.749,48.889 v1(27.749,48.959)
  BOTTOM w0.2: LED3.A 3.508,31.185 4.153,31.831 4.153,45.134 8.248,49.229 12.883,49.229 14.044,48.068 23.264,48.068 23.624,47.707 26.856,47.707 27.133,47.983 27.849,48.7 27.798,48.75 27.798,48.91 v1(27.749,48.959)
AUX1_D_1: U2.38
AUX1_E_1: LED4.A U2.41 | length 45.4
  TOP w0.2: U2.41 28.227,48.063 28.227,48.518 28.518,48.809 28.518,49.339 v1@28.599,49.419
  BOTTOM w0.2: LED4.A 3.144,29.741 4.503,31.1 4.503,44.904 8.378,48.779 12.583,48.779 13.644,47.718 23.003,47.718 23.363,47.357 27.077,47.357 28.529,48.809 v1@28.529,49.429
  other v1: 28.518,49.369
AUX2_A_SCLK_1: U2.6
BOOT0_1: R5.1 S1.2 U2.46 | length 40.9
  TOP w0.25: R5.1 25.54,49.611 v1@25.54,48.983 ; v1@25.546,48.939 25.56,48.939 25.675,48.824 U2.46
  BOTTOM w0.25: v1(25.576,48.979) 26.557,49.96 29.529,49.96 30.891,48.599 30.891,46.096 34.074,42.913 34.074,36.026 36.086,34.014 36.086,29.349 38.639,26.797 38.639,24.384 39.57,23.453 42.083,23.453 42.229,23.6 S1.2
CAN1_H_1: CN1.1 D1.1 R1.1 U1.7 | length 20.7
  TOP w0.25: U1.7@33.083,32.092 33.083,30.991 33.584,30.49 36.386,30.49 38.288,28.589 38.288,27.197 41.081,24.404 41.081,22.042 40.37,21.331 39.998,21.331 39.47,20.802 CN1.1 38.67,20.802 38.495,20.627 38.495,19.867 38.488,19.86 R1.1@38.488,19.079
  BOTTOM w0.3: D1.1 33.113,31.722 v1@33.113,30.981
  other v1: 33.103,31.061
CAN1_L_1: CN1.2 D1.2 S1.1 U1.6 | length 18.9
  TOP w0.25: U1.6@31.834,31.904 31.834,31.159 32.973,30.02 36.006,30.02 37.818,28.208 37.818,27.002 40.671,24.149 40.671,22.523 40.2,22.052 CN1.2
  BOTTOM w0.25: v1@39.93,24.925 40.101,25.096 S1.1
  BOTTOM w0.3: v1(32.282,30.711) 32.312,30.681 32.312,30.422 32.783,29.952 D1.2
  other v1: 39.882,24.886
CAN_GND: CN1.3 D1.3 R4.2 | length 14.2
  TOP w0.3: R4.2 31.4,30.712 32.543,29.57 35.726,29.57 37.167,28.128 37.167,26.877 39.069,24.975 39.069,23.403 CN1.3@39.079,23.393
  BOTTOM w0.3: D1.3 30.641,30.752 31.38,30.752 v1@31.602,30.531
  other v1: 31.532,30.531
CAN_RX_1: U1.4 U2.25 | length 5.3
  TOP w0.2: U1.4 30.676,37.943 30.676,38.814 31.792,39.93 31.792,41.582 31.567,41.807 U2.25
CAN_STB_1: U1.8 U2.24 | length 14.2
  TOP w0.25: U2.24 30.175,40.376 v1@30.731,39.82 ; U1.8 35.207,32.431 v1@35.235,32.402
  BOTTOM w0.25: v1(30.721,39.89) 31.501,40.671 33.183,40.671 33.674,40.18 33.674,35.465 35.145,33.994 35.145,32.522 v1@35.115,32.492
  other v1: 35.145,32.472
CAN_TX_1: U1.1 U2.26 | length 6.2
  TOP w0.2: U2.26@31.025,42.307 31.586,42.307 32.98,40.912 32.98,40.892 34.374,39.498 U1.1
DAC_1: U2.12
DRV8323_CS_1: U2.17
DRV8323_MISO_1: U2.40
DRV8323_MOSI_1: U2.2
DRV8323_SCLK_1: U2.39
FCUR1_1: U2.11
FCUR2_1: U2.14
FCUR3_1: U2.18
GND: 1.8 1.13 C1.1 C2.2 C3.2 C4.1 C5.2 C6.2 C7.1 C8.2 C9.2 C10.1 C13.1 C14.1 C16.1 C23.1 C24.1 C25.2 D4.1 J1.A1 J1.B1 J1.S1 J1.S2 J1.S3 J1.S4 P1.2 R4.1 R5.2 R6.1 R7.1 R8.1 R9.1 R10.2 R11.2 R16.1 R17.1 U1.2 U1.9 U2.49 U3.2 U4.1 U4.2 U4.7 U5.2 VT1.2 | length 31.7
  TOP w0.2: v1@20.38,32.342 20.4,32.362 21.632,32.362 22.154,31.84 U4.7
  TOP w0.3: R6.1@3.854,34.083 3.854,29.702 R9.1 ; R6.1 3.891,34.078 5.351,34.078 v1(5.355,34.074) ; U4.2 23.154,35.747 v1@23.323,35.916 ; v1@23.433,35.916 23.654,35.695 U4.1 ; R11.2 37.722,31.443 37.722,30.446 R10.2@37.738,30.43
  TOP w0.35: C16.1 20.29,31.76 v1@20.29,32.342 ; v1@21.331,46.707 C4.1@21.331,47.299 ; v1@22.413,42.693 C10.1@22.413,43.285 ; C7.1@24.514,50.659 v1@24.514,51.251 ; R5.2@25.515,50.689 v1@25.515,51.281 ; C5.2 27.919,38.626 C6.2@28.779,38.626 ; v1(28.769,38.096) 28.774,38.102 28.774,38.622 C6.2@28.779,38.626 ; C3.2@28.889,33.261 v1@28.889,33.854 ; v1@29.1,30.711 R4.1 ; C9.2@29.727,38.626 C6.2@28.779,38.626 ; v1@30.961,49.42 VT1.2@30.961,50.012 ; U1.9@33.053,35.626 33.104,35.677 U1.2 33.234,37.961 33.234,39.03 33.297,39.093 33.297,39.552 33.355,39.61 C2.2@33.383,39.61 ; C8.2@33.537,47.077 v1@33.956,46.658 ; v1@36.356,43.634 36.834,43.634 C1.1 ; v1(37.057,30.771) 37.077,30.75 37.416,30.75 37.649,30.518 R10.2@37.649,30.44
  BOTTOM w0.35: 1.8 39.631,43.333 v1@41.632,43.333 ; 1.13 39.634,46.837 v1@41.572,46.837 ; J1.B1@40.431,34.032 v1@40.431,34.624 ; v1@42.432,27.768 J1.A1@42.432,28.36
  other v1: 42.442,27.758 29.099,30.711 20.3,32.362 28.899,33.864 40.42,34.635 23.383,35.856 17.367,38.894 17.984,38.894 17.367,39.469 17.984,39.469 17.367,40.062 17.984,40.062 22.402,42.683 41.632,43.343 36.326,43.654 6.585,43.804 7.177,43.804 7.753,43.804 26.296,44.029 26.913,44.029 27.598,44.039 28.214,44.039 6.585,44.42 7.177,44.42 7.753,44.42 26.296,44.605 26.913,44.605 27.598,44.615 28.214,44.615 26.296,45.197 26.913,45.197 27.598,45.207 28.214,45.207 17.275,46.366 17.868,46.366 18.443,46.366 33.956,46.644 21.321,46.697 41.582,46.847 17.275,46.983 17.868,46.983 18.443,46.983 30.951,49.409 24.524,51.261 25.525,51.291
  other v2: 32.512,35.295
LCD_CS_1: 1.7 U2.32 | length 9.9
  TOP w0.25: U2.32 31.807,45.307 34.481,42.633 v1@37.207,42.633
  BOTTOM w0.25: v1@37.147,42.623 37.164,42.64 39.611,42.64 1.7
  other v1: 37.187,42.653
LCD_DC_1: 1.5 U2.30 | length 10.2
  TOP w0.2: U2.30 31.665,44.307 34.821,41.151 v1@37.307,41.151
  BOTTOM w0.2: v1@37.247,41.121 37.427,41.121 37.532,41.227 1.5
  other v1: 37.327,41.091
LCD_MOSI_1: 1.3 U2.15 | length 16.4
  TOP w0.2: v1@25.626,39.89 25.63,39.894 25.63,41.058 U2.15 ; v1(33.433,41.191) 33.433,41.161 34.715,39.88 v1(36.967,39.88)
  BOTTOM w0.2: v1(25.586,39.95) 26.827,41.191 v1(33.433,41.191) ; v1@36.897,39.88 v1(36.967,39.88) 39.571,39.88 1.3
LCD_RES_1: 1.6 U2.31 | length 10
  TOP w0.2: U2.31 31.72,44.807 34.655,41.872 v1@37.347,41.872
  BOTTOM w0.2: v1@37.337,41.862 37.347,41.862 37.412,41.927 1.6
  other v1: 37.267,41.852
LCD_SCK_1: 1.4 U2.13 | length 17.5
  TOP w0.2: v1@24.635,40.06 v1(24.645,40.07) 24.66,40.085 24.66,41.087 U2.13 ; v1(33.313,41.982) 33.626,41.67 33.632,41.67 34.821,40.48 v1(37.327,40.48)
  BOTTOM w0.2: v1(24.645,40.07) 24.693,40.119 24.943,40.119 26.416,41.592 32.923,41.592 v1(33.313,41.982) ; v1@37.283,40.527 1.4
LED1_1: U2.28
LED2_1: U2.29
MOTOR1_1: U2.8
MOTOR2_1: U2.9
MOTOR3_1: U2.10
MOTOR_ENABLE_1: U2.3
MOTOR_HIZ_1: U2.4
Net1_11: 1.11 R2.2 | length 8.8
  TOP w0.25: R2.2@34.336,50.03 34.336,47.276 36.176,45.435 v1@37.357,45.435
  BOTTOM w0.25: v1@37.347,45.475 37.386,45.437 39.614,45.437 1.11
  other v1: 37.339,45.447
NetC15_1: C15.1 C18.1 D4.2 L1.1 U5.6
NetC15_2: C15.2 C18.2 U5.1
NetC17_2: C17.2 R15.1 R16.2 U5.3 | length 3.2
  TOP w0.3: R16.2@6.647,41.552 6.682,41.516 R16.2 9.626,41.516 U5.3
NetC25_1: C25.1 D5.2 R18.1 U5.5
NetCN1_4: CN1.4 CN1.5
NetJ1_A5: J1.A5 R10.1 | length 5.2
  TOP w0.2: R10.1 38.745,30.44 43.014,30.44 v1(43.045,30.471)
  BOTTOM w0.2: J1.A5 42.222,30.457 43.031,30.457 v1(43.045,30.471)
NetJ1_B5: J1.B5 R11.1 | length 2.1
  TOP w0.2: R11.1 39.235,31.953 39.46,31.953 v1(39.509,32.002)
  BOTTOM w0.2: v1(39.509,32.002) 39.539,31.972 40.518,31.972 J1.B5
NetLED1_A: LED1.A U2.44 | length 39.1
  TOP w0.2: U2.44 26.686,48.022 26.686,49.201 v1(26.698,49.213)
  BOTTOM w0.2: LED1.A 2.558,34.075 2.758,34.275 2.758,34.35 3.453,35.045 3.453,45.424 7.979,49.95 13.152,49.95 14.334,48.768 23.915,48.768 24.275,48.407 25.945,48.407 26.698,49.16 v1(26.698,49.213)
NetLED1_C: LED1.C R6.2 | length 2.7
  TOP w0.2: v1(1.333,34.816) 2.076,34.074 2.809,34.074 2.863,34.127 R6.2@2.863,34.144
  BOTTOM w0.2: LED1.C 1.351,34.189 v1@1.351,34.805
NetLED2_A: LED2.A U2.43 | length 41.7
  TOP w0.2: U2.43 27.175,48.752 27.176,48.754 27.176,49.189 27.447,49.459 v1@27.457,49.459
  BOTTOM w0.2: LED2.A 2.683,32.83 3.2,32.83 3.803,33.433 3.803,45.279 8.103,49.579 13.028,49.579 14.189,48.418 23.614,48.418 23.975,48.057 26.336,48.057 27.219,48.941 27.219,49.067 27.308,49.156 v1@27.308,49.39
  other v1: 27.357,49.439
NetLED2_C: LED2.C R7.2 | length 2.5
  TOP w0.2: v1(1.283,33.305) 1.906,32.683 R7.2@2.923,32.683
  BOTTOM w0.2: LED2.C@1.301,32.677 v1@1.301,33.293
NetLED3_C: LED3.C R8.2 | length 2.5
  TOP w0.2: v1(1.223,31.833) 1.916,31.141 R8.2@2.863,31.141
  BOTTOM w0.2: LED3.C@1.241,31.206 v1@1.241,31.822
NetLED4_C: LED4.C R9.2 | length 2.6
  TOP w0.2: v1(1.223,30.362) 1.917,29.668 2.761,29.668 R9.2@2.853,29.76
  BOTTOM w0.2: LED4.C@1.241,29.734 v1@1.241,30.35
NetR1_2: R1.2 S1.4 | length 2.6
  TOP w0.25: R1.2 v1@40.047,17.955
  BOTTOM w0.25: v1(39.972,17.98) 40.999,17.98 S1.4@41.001,17.978
NetR2_1: R2.1 VT1.3 | length 1.5
  TOP w0.25: VT1.3 R2.1@34.358,51.132
NetR3_2: R3.2 VT1.1 | length 1.5
  TOP w0.25: R3.2@29.172,51.962 30.515,51.962 VT1.1
NetR18_2: R18.2 U5.4 | length 1.4
  TOP w0.39: R18.2 8.622,39.587 9.823,39.587 U5.4@9.87,39.539
NetR19_1: R19.1 S1.3 | length 17.9
  TOP w0.2: v1@35.429,31.655 R19.1
  BOTTOM w0.2: v1(35.455,31.642) 35.455,29.449 38.148,26.757 38.148,24.244 42.212,20.18 S1.3@42.212,18.358
  BOTTOM w0.3: S1.3 42.229,17.109 S1.3@42.359,16.979
NRST_1: C10.2 U2.7 | length 1.6
  TOP w0.25: C10.2@22.392,44.274 22.425,44.307 U2.7
PGND: C19.2 C20.2 C21.2 C22.2 D3.1 P2.1 P3.1 R17.2
  other v1: 17.001,1.88 17.618,1.88 15.796,1.897 16.412,1.897 28.318,1.907 28.935,1.907 29.69,1.897 30.306,1.897 23.393,1.967 24.01,1.967 33.684,1.957 34.3,1.957 35.075,1.947 35.691,1.947 22.142,1.987 22.759,1.987 15.796,2.472 16.412,2.472 17.001,2.472 17.618,2.472 29.69,2.472 30.306,2.472 28.318,2.482 28.935,2.482 35.075,2.523 35.691,2.523 23.393,2.543 24.01,2.543 33.684,2.533 34.3,2.533 22.142,2.563 22.759,2.563 17.001,3.048 17.618,3.048 15.796,3.065 16.412,3.065 28.318,3.075 28.935,3.075 29.69,3.065 30.306,3.065 23.393,3.135 24.01,3.135 33.684,3.125 34.3,3.125 35.075,3.115 35.691,3.115 22.142,3.155 22.759,3.155 16.226,24.55 16.843,24.55 29.189,24.55 29.806,24.55 34.565,24.55 35.181,24.55 35.856,24.55 36.472,24.55 17.748,24.57 18.364,24.57 23.794,24.62 24.41,24.62 27.758,24.62 28.374,24.62 22.372,24.64 22.989,24.64 16.226,25.125 16.843,25.125 29.189,25.125 29.806,25.125 34.565,25.125 35.181,25.125 35.856,25.125 36.472,25.125 17.748,25.145 18.364,25.145 23.794,25.195 24.41,25.195 27.758,25.195 28.374,25.195 22.372,25.215 22.989,25.215 16.226,25.718 16.843,25.718 29.189,25.718 29.806,25.718 34.565,25.718 35.181,25.718 35.856,25.718 36.472,25.718 17.748,25.738 18.364,25.738 23.794,25.788 24.41,25.788 27.758,25.788 28.374,25.788 22.372,25.808 22.989,25.808
PWM_A1_1: R3.1 U2.45 | length 5.6
  TOP w0.25: U2.45 26.175,50.169 26.967,50.961 R3.1@29.252,50.961
PWR\_SDA_1: R13.1 U2.5 U4.4 | length 19
  TOP w0.2: U4.4 22.154,33.451 22.443,33.163 24.194,33.163 25.175,34.144 25.175,35.776 21.532,39.419 21.532,44.394 22.444,45.307 U2.5@23.782,45.307
PWR_SCL_1: R14.1 U2.16 U4.5 | length 14
  TOP w0.2: U4.5 21.654,33.2 22.042,32.813 24.364,32.813 25.616,34.064 25.616,34.655 27.147,36.186 27.147,38.821 26.979,38.989 26.817,38.989 26.175,39.631 26.175,40.952 U2.16@26.156,40.971
SWCLK_1: P1.3 U2.37 | length 14.6
  TOP w0.25: P1.3 23.147,52.261 23.718,52.832 31.177,52.832 31.692,52.317 31.692,48.899 31.085,48.292 30.202,48.292 30.175,48.265 U2.37
SWDIO_1: P1.1 U2.36 | length 21.1
  TOP w0.25: P1.1@17.858,52.342 19.038,52.342 20.099,53.403 31.171,53.403 32.092,52.482 32.092,47.968 31.45,47.325 30.898,47.325 U2.36
USB_ST_DM_1: J1.A7 J1.B7 U2.33 | length 23.3
  TOP w0.2: U2.33 32.072,45.807 32.163,45.716 v1(32.232,45.716)
  BOTTOM w0.2: v1(32.232,45.716) 32.272,45.756 33.373,45.756 35.235,43.894 35.235,38.248 37.305,36.178 37.305,32.104 38.547,30.863 39.798,30.863 39.877,30.942 J1.B7 40.598,30.992 41.133,30.992 41.582,31.441 J1.A7@42.052,31.441
USB_ST_DP_1: J1.A6 J1.B6 U2.34 | length 26.1
  TOP w0.2: U2.34 30.884,46.311 32.718,46.311 v1@32.723,46.316 ; v1(39.6,31.341) 42.847,31.341 42.947,31.241 v1@43.063,31.241
  BOTTOM w0.2: v1(32.693,46.316) 32.723,46.346 33.323,46.346 35.626,44.044 35.626,38.353 37.655,36.323 37.655,32.305 38.667,31.292 39.551,31.292 v1(39.6,31.341) 39.669,31.341 39.77,31.442 J1.B6 ; J1.A6 42.258,30.992 42.804,30.992 v1@43.023,31.211
  other v1: 43.045,31.213
VCC_5V: C2.1 C17.1 C23.2 C24.2 L1.2 R15.2 U1.3 U3.1 U3.3 | length 26.7
  TOP w0.3: C17.1 7.705,42.633 R15.2@8.619,42.633 ; R15.2 8.565,42.623 v1@9.159,42.623 ; U1.3 31.834,38.326 32.352,38.845 C2.1@32.352,39.61 ; C2.1 32.372,39.643 32.372,40.155 v1(32.385,40.167)
  BOTTOM w0.3: v1(9.121,42.631) 10.34,43.85 10.34,45.425 10.681,45.766 ; 16.036,38.929 16.036,38.338 16.807,37.568 30.35,37.568 32.354,39.572 32.354,40.137 v1(32.385,40.167)
  other v1: 15.385,39.104 15.385,39.68 16.002,39.68 15.385,40.272 16.002,40.272 11.171,46.732 11.788,46.732 11.171,47.307 11.788,47.307 11.171,47.9 11.788,47.9
VCC_IN: C19.1 C20.1 C21.1 C22.1 D2.1 P2.2 R12.2 U4.9 | length 23.7
  TOP w0.25: v1@22.913,28.929 23.154,29.17 U4.9
  PWR w0.25: v1(12.913,20.15) 11.862,20.15 11.642,19.93 11.642,19.55 12.273,18.918 13.684,18.918 15.405,17.197 17.087,17.197 20.391,20.501 20.391,26.387 v1(22.853,28.849)
  other v1: 16,19.207 16.617,19.207 16,19.8 16.617,19.8 16,20.375 16.617,20.375 6.945,29.179 7.538,29.179 8.113,29.179 6.945,29.796 7.538,29.796 8.113,29.796
VCC_IN_24V: P3.2 R12.1 U4.8 U4.10 | length 51.1
  TOP w0.25: v1(21.762,28.869) 21.801,28.908 22.132,28.908 22.65,29.426 22.65,30.315 U4.8 ; U4.10 23.66,30.314 23.66,28.832 v1(23.684,28.809)
  PWR w0.25: v1(8.248,20.18) 10.19,20.18 11.852,18.518 13.443,18.518 15.305,16.657 17.407,16.657 20.791,20.04 20.791,26.006 22.147,27.363 22.237,27.363 v1(23.684,28.809)
  PWR w0.3: v2(9.72,21.131) 9.777,21.189 v2@9.973,21.189 ; v2@9.72,21.191 9.75,21.161 9.78,21.131 13.664,21.131 14.204,20.591 14.204,19.63 15.676,18.158 16.937,18.158 19.67,20.891 19.67,26.922 20.628,27.88 20.773,27.88 v1(21.762,28.869)
VCC_L: D2.2 D3.2 D5.1
VDD_USB: J1.A4 J1.A9 J1.B4 J1.B9 | length 8.1
  BOTTOM w0.3: J1.B4 J1.A9@42.152,32.442 ; J1.B9@40.691,29.95 40.698,29.942 J1.A4 43.296,29.942 43.724,30.37 43.724,31.992 43.273,32.442 J1.A9
pads on no net: 1.1 1.2 1.9 J1. J1.A2 J1.A3 J1.A8 J1.A10 J1.A11 J1.A12 J1.B2 J1.B3 J1.B8 J1.B10 J1.B11 J1.B12 U2.22 U2.27 U2.47 U3.4 U4.3
copper on no net: | length 1.2
  BOTTOM w0.35: v1@40.32,27.788 40.32,28.38 ; 42.423,34.062 v1@42.423,34.654
  other v1: 40.33,27.778 42.412,34.665

## Polygon pours and split planes (outlines as drawn)
VCC_5V on BOTTOM "NONET_L01_P-001" (solid, pour order 18): 14.885,38.889 14.885,44.454 14.014,45.325 10.881,45.325 10.41,45.796 10.41,47.968 10.561,48.118 12.322,48.118 12.422,48.018 12.422,46.797 12.963,46.256 15.355,46.256 16.386,45.225 16.386,38.779 16.186,38.579 15.065,38.579 14.845,38.799 14.895,38.849 14.895,38.879
PGND on BOTTOM "NONET_L01_P-001" (solid, pour order 16): 35.926,10.35 43.634,10.35 44.044,9.94 44.044,5.826 43.694,5.475 34.665,5.475 33.724,6.416 33.724,8.178 35.926,10.38
PGND on BOTTOM "NONET_L01_P-001" (solid, pour order 15): 0.14,27.648 35.105,27.648 36.296,26.456 36.296,0.821 35.556,0.08 15.796,0.08 15.085,0.791 15.085,13.924 17.628,16.466 17.628,22.482 17.037,23.073 0.541,23.073 0.03,23.584 0.03,27.477 0.21,27.658
3V3 on TOP "NONET_L01_P-001" (solid, pour order 21): 14.915,50.39 15.075,50.551 18.719,50.551 18.989,50.28 18.989,48.528 18.779,48.318 15.145,48.318 14.915,48.549
GND on TOP "NONET_L01_P-001" (solid, pour order 20): 12.853,48.008 18.729,48.008 18.839,47.898 18.839,46.116 18.719,45.996 14.244,45.996 14.034,46.206 14.034,47.147 13.854,47.327 12.923,47.327 12.743,47.507 12.743,47.908 12.853,48.018
GND on TOP "NONET_L01_P-001" (solid, pour order 19): 10.3,43.433 10.33,43.463 11.021,43.463 11.091,43.393 11.091,41.141 10.951,41.001 10.46,41.001 10.3,41.161 10.3,41.592
VCC_5V on TOP "NONET_L01_P-001" (solid, pour order 17): 12.533,48.248 12.442,48.158 12.442,47.197 12.593,47.047 13.604,47.047 13.724,46.927 13.724,45.926 13.604,45.806 10.831,45.806 10.631,46.006 10.631,49.029 10.781,49.179 13.544,49.179 13.694,49.029 13.694,48.318 13.624,48.248
VCC_IN on TOP "NONET_L01_P-001" (solid, pour order 14): 6.707,31.772 6.126,31.191 6.126,29.009 6.376,28.759 8.809,28.759 9.119,29.069 9.119,31.461 8.819,31.762 6.737,31.762 6.707,31.732
PGND on TOP "NONET_L01_P-001" (solid, pour order 12): 9.489,29.75 10.07,30.33 13.604,30.33 14.234,30.961 14.234,33.103 14.575,33.443 17.467,33.443 18.078,32.833 18.078,27.027 10.38,27.027 9.489,27.918
VCC_5V on TOP "NONET_L01_P-001" (solid, pour order 11): 15.245,42.973 15.395,42.823 15.395,40.711 15.516,40.591 16.316,40.591 16.426,40.48 16.426,38.979 16.206,38.759 14.324,38.759 14.194,38.889 14.194,42.833 14.334,42.973 14.464,42.973
GND on TOP "NONET_L01_P-001" (solid, pour order 10): 7.117,42.232 7.117,42.813 7.437,43.133 10.771,43.133 11.241,43.604 15.576,43.604 15.736,43.443 15.736,41.151 15.906,40.981 16.587,40.981 16.857,40.711 16.857,38.278 16.366,37.788 16.366,36.807 15.946,36.386 13.894,36.386 13.684,36.597 13.684,37.588 13.363,37.908 12.573,37.908 12.362,37.698 12.362,36.276 12.673,35.966 13.674,35.966 15.145,34.494 17.367,34.494 18.418,35.546 18.418,42.723 16.336,44.805 6.366,44.805 5.986,44.424 5.986,42.432 6.176,42.242 7.077,42.242 7.087,42.232
NetC15_2 on TOP "NONET_L01_P-001" (solid, pour order 9): 11.311,43.063 11.471,43.223 13.774,43.223 13.994,43.003 13.994,41.652 13.904,41.562 12.122,41.562 12.042,41.481 12.042,41.041 11.922,40.921 11.491,40.921 11.311,41.101
NetC15_1 on TOP "NONET_L01_P-001" (solid, pour order 7): 11.371,38.569 13.223,38.569 14.104,37.688 14.104,37.087 14.274,36.917 15.155,36.917 15.435,37.197 15.435,38.188 15.285,38.338 14.274,38.338 13.794,38.819 13.794,40.11 14.014,40.33 14.014,41.101 13.864,41.251 12.573,41.251 12.232,40.911 12.232,40.4 12.072,40.24 11.391,40.24 11.291,40.14 11.291,38.649 11.391,38.549
NetC25_1 on TOP "NONET_L01_P-001" (solid, pour order 6): 9.349,36.857 9.349,37.698 8.919,38.128 8.118,38.128 7.968,38.278 7.968,38.839 8.138,39.009 8.789,39.009 9.059,38.739 9.059,38.539 9.269,38.328 10.24,38.328 10.38,38.468 10.38,39.79 10.49,39.9 10.981,39.9 11.091,39.79 11.091,38.438 11.331,38.198 11.912,38.198 12.092,38.018 12.092,36.557 11.872,36.336 9.51,36.336 9.319,36.526
VCC_L on TOP "NONET_L01_P-001" (solid, pour order 5): 10.861,32.232 10.48,32.232 9.8,32.913 6.506,32.913 6.196,33.223 6.196,37.558 6.476,37.838 8.178,37.838 8.649,37.367 8.649,36.096 9.269,35.475 13.243,35.475 13.443,35.275 13.443,32.482 13.223,32.262 10.43,32.262
PGND on TOP "NONET_L01_P-001" (solid, pour order 3): 32.873,4.925 38.208,10.26 43.784,10.26 44.164,9.88 44.164,5.996 43.674,5.506 39.96,5.506 38.258,3.804 38.258,0.551 37.738,0.03 15.686,0.03 15.055,0.661 15.055,4.515 15.465,4.925
PGND on TOP "NONET_L01_P-001" (solid, pour order 2): 5.395,22.583 5.736,22.923 18.388,22.923 20.34,20.971 36.286,20.971 36.757,21.441 36.757,26.386 35.055,28.088 0.35,28.088 0.09,27.828 0.09,22.813 0.32,22.583
VCC_IN on TOP "NONET_L01_P-001" (solid, pour order 1): 11.682,21.511 12.142,21.972 16.376,21.972 18.579,19.77 34.474,19.77 38.769,15.475 43.674,15.475 44.274,14.875 44.274,11.762 43.874,11.361 37.848,11.361 33.584,7.097 16.026,7.097 14.795,8.328 14.795,15.135 11.682,18.248
VCC_IN_24V on TOP "NONET_L01_P-001" (solid, pour order 0): 0.46,21.632 5.606,21.632 5.866,21.892 9.88,21.892 10.02,21.752 10.02,18.338 9.8,18.118 0.28,18.118 0.09,18.308 0.09,21.261
3V3 on PWR "NONET_L01_P-001" (solid, pour order 23): 0.15,48.058 4.244,48.058 10.12,53.934 34.595,53.934 40.03,48.498 43.203,48.498 43.854,47.848 43.854,26.867 43.684,26.697 38.228,26.697 36.677,28.248 36.677,33.964 36.046,34.595 30.42,34.595 29.6,33.774 29.6,30.19 25.576,30.19 23.614,32.152 21.271,32.152 20.971,31.852 20.971,29.62 20.681,29.329 19.319,29.329 18.969,29.68 18.969,33.442 17.967,34.444 14.875,34.444 12.633,36.687 6.386,36.687 4.925,35.225 4.925,29.54 4.575,29.189 0.38,29.189 0.12,29.449 0.12,47.678 0.511,48.068
VCC_IN on PWR "NONET_L01_P-001" (solid, pour order 22): 15.706,19.059 15.385,19.379 15.385,21.011 13.033,23.363 8.929,23.363 6.386,25.906 6.386,29.89 6.677,30.18 8.519,30.18 8.729,29.97 8.729,25.956 9.95,24.735 13.934,24.735 17.277,21.391 17.277,19.399 16.887,19.009 15.796,19.009 15.746,19.059
GND on GND (split plane): 41.616,53.476 41.837,53.447 42.055,53.399 42.267,53.332 42.474,53.246 42.672,53.143 42.86,53.023 43.037,52.887 43.189,52.748 43.2,52.735 43.21,52.726 43.315,52.611 43.415,52.475 43.502,52.33 43.575,52.177 43.632,52.018 43.673,51.854 43.697,51.687 43.705,51.532 43.704,51.518 43.704,26.907 36.577,26.907 36.577,29.339 0.611,29.339 0.611,51.272 0.609,51.289 0.618,51.495 0.647,51.717 0.695,51.935 0.762,52.147 0.848,52.354 0.951,52.551 1.071,52.74 1.207,52.917 1.346,53.069 1.359,53.08 1.368,53.09 1.473,53.184 1.599,53.274 1.735,53.349 1.878,53.408 2.027,53.451 2.18,53.477 2.321,53.485 2.334,53.483 41.393,53.483 41.409,53.485

## Other copper
TOP:
  rectangle net NetCN1_4: 41.582,18.709 44.074,25.465
GND (plane layer: these items are gaps in the copper):
  rectangle: 36.216,-0.29 43.994,26.907
  rectangle: 0.02,0.19 36.577,29.339

## Silkscreen, mask and mechanical layers (free items; w line width, h text height)
Top Overlay:
  lines w0.1: 0.05,49.195 cw(c0.084,49.195) 0.06,49.219 ; 14.403,11.9 ccw(c7.798,11.261) 14.433,11.392 ; 21.471,48.939 21.471,48.959
  text "GND" at 0.08,24.974 h1
  text "+24" at 0.1,21.228 h1
  text "+24" at 38.138,12.65 h1
  text "GND" at 37.708,8.657 h1
Bottom Overlay:
  lines w0.1: 21.471,48.959 5.876,48.959 5.876,36.176 33.944,36.176
Machine 1:
  lines w0.1: 14.725,1.191 14.725,2.262 ; 0.1,20.658 ccw(c2.366,20.658) 0.764,19.056 ccw(c2.932,21.224) 2.932,18.158 11.052,18.158 cw(c11.052,15.092) 13.22,17.26 13.817,16.664 cw(c11.649,14.496) 14.715,14.496 14.744,1.089 ccw(c15.833,1.089) 15.833,0 42.332,0 ccw(c42.332,1.208) 43.187,0.354 43.674,0.841 ccw(c42.369,2.146) 44.214,2.146 44.214,51.518 ccw(c41.983,51.518) 43.561,53.096 ccw(c41.393,50.928) 41.393,53.994 2.334,53.994 ccw(c2.334,52.104) 0.998,53.441 ccw(c3.166,51.272) 0.1,51.272 0.1,20.658

## Text inside footprints (layer, text, board x,y; h text height)
S1: Bottom Overlay "2" at 42.152,23.407 h0.51 r180; Bottom Overlay "1" at 40.882,23.407 h0.51 r180; Bottom Overlay "N" at 42.152,19.927 h0.51 r180; Bottom Overlay "O" at 40.882,19.927 h0.51 r180